# EAGLE board electronicDie_panel2x1 (EAGLE 9.6.2)
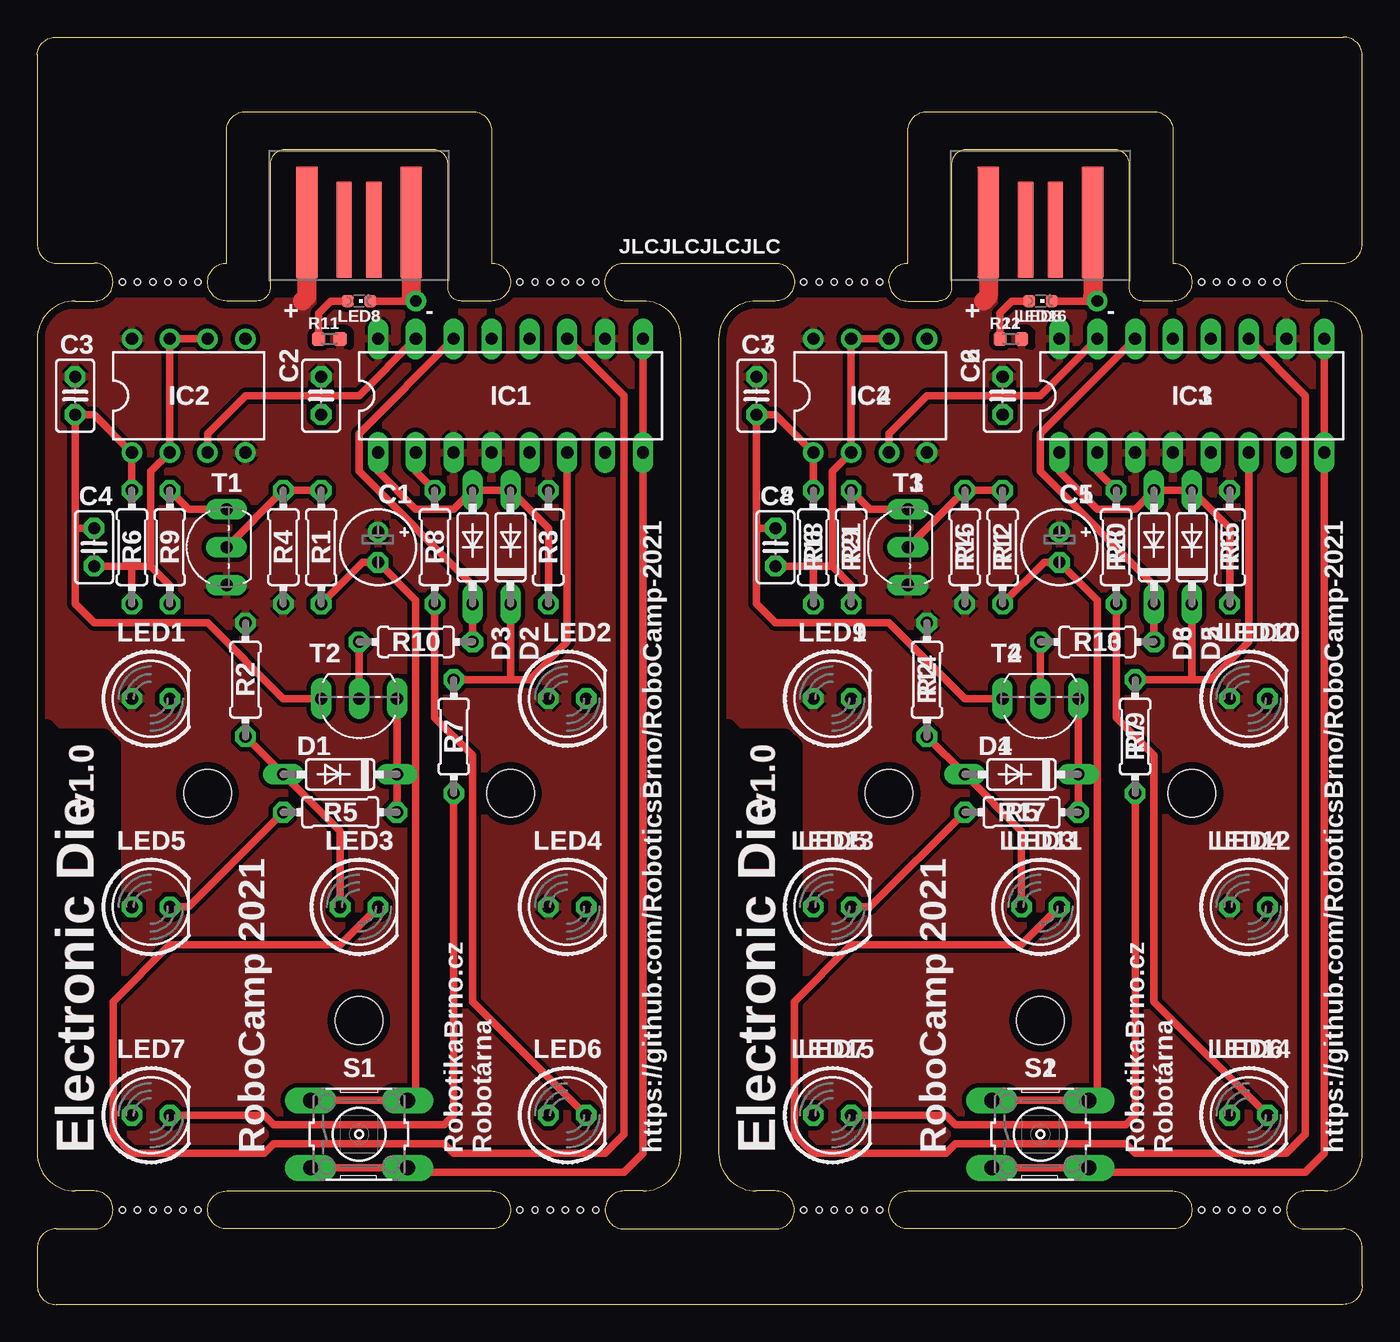
[diagram p0: board, top side]
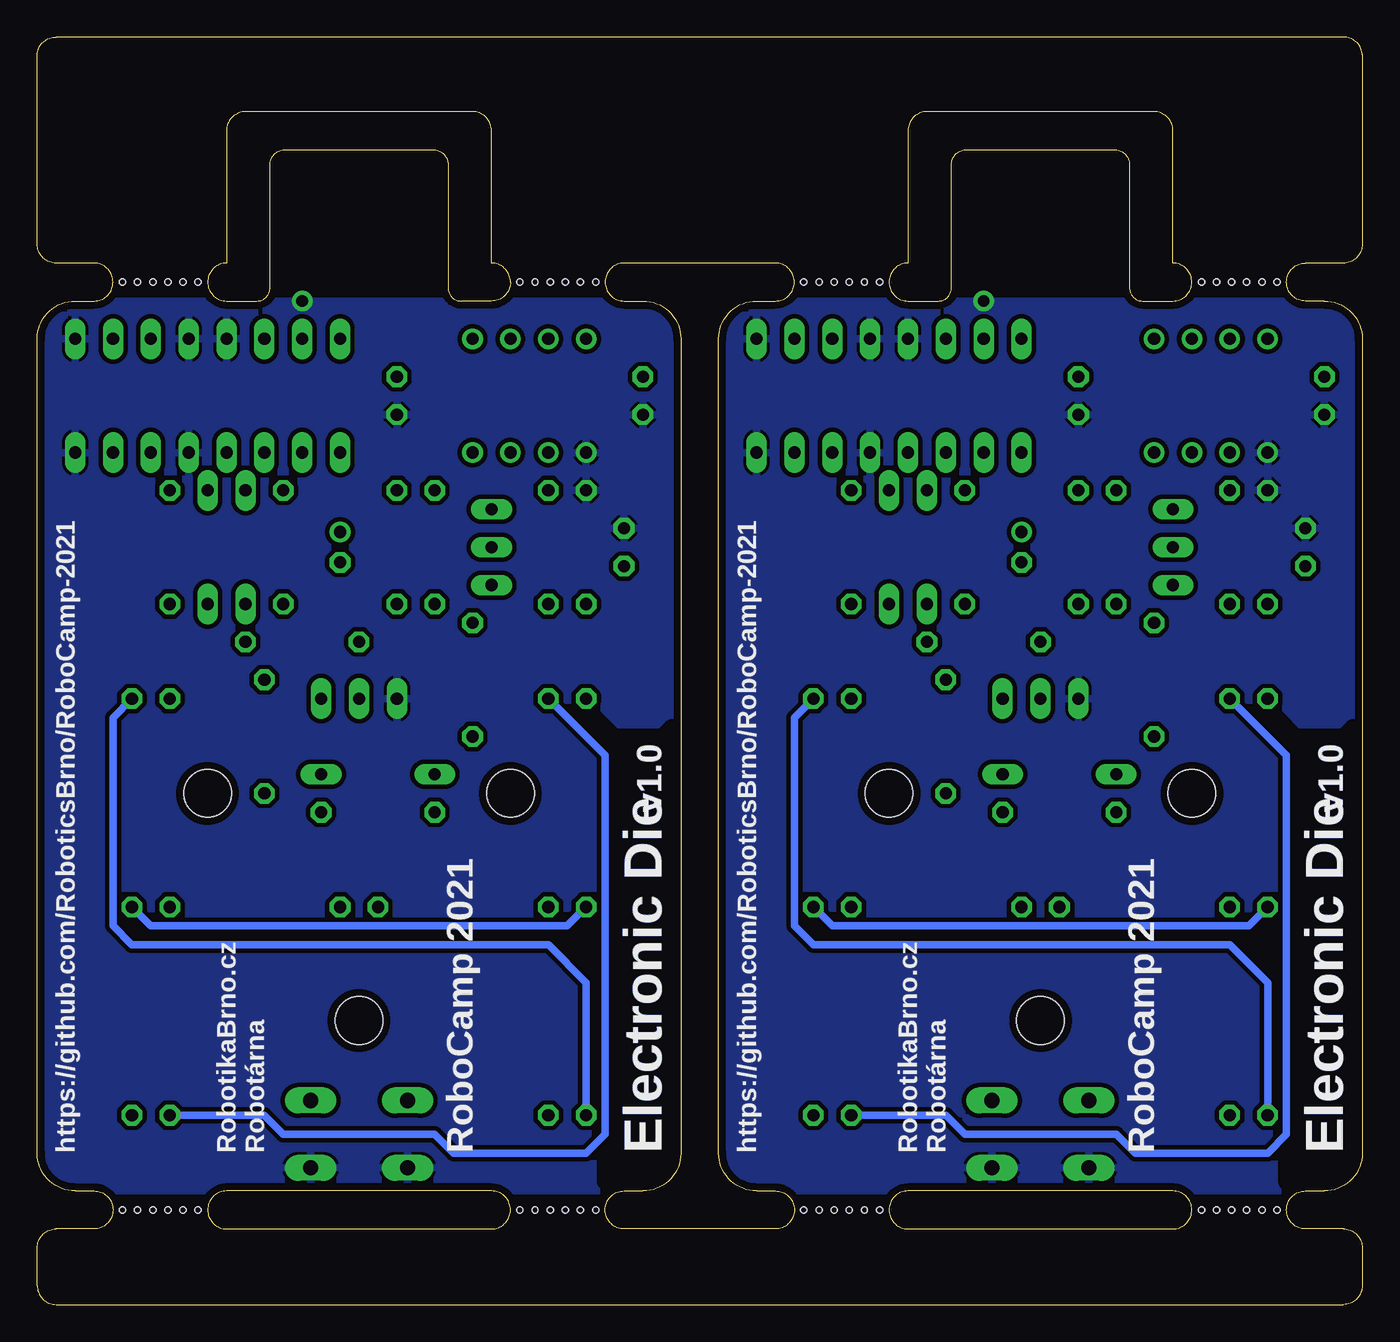
[diagram p1: board, bottom side, seen from below]

Size 88.9 x 85 mm. Coordinates in mm from the lower left corner, seen from the top.
Outline: 0,10.16 arc90 2.54,7.62 3.81,7.62 arc-90 5.08,6.35 arc-90 3.81,5.08 1.27,5.08 arc90 0,3.81 0,1.27 arc90 1.27,0 87.63,0 arc90 88.9,1.27 88.9,3.81 arc90 87.63,5.08 85.09,5.08 arc-90 83.82,6.35 arc-90 85.09,7.62 86.36,7.62 arc90 88.9,10.16 88.9,64.77 arc90 86.36,67.31 85.09,67.31 arc-90 83.82,68.58 arc-90 85.09,69.85 87.63,69.85 arc90 88.9,71.12 88.9,83.82 arc90 87.63,85 1.27,85 arc90 0,83.82 0,71.12 arc90 1.27,69.85 3.81,69.85 arc-90 5.08,68.58 arc-90 3.81,67.31 2.54,67.31 arc90 0,64.77 0,10.16
Outline: 40.64,7.62 arc90 43.18,10.16 43.18,64.77 arc90 40.64,67.31 39.37,67.31 arc-90 38.1,68.58 arc-90 39.37,69.85 49.53,69.85 arc-90 50.8,68.58 arc-90 49.53,67.31 48.26,67.31 arc90 45.72,64.77 45.72,10.16 arc90 48.26,7.62 49.53,7.62 arc-90 50.8,6.35 arc-90 49.53,5.08 39.37,5.08 arc-90 38.1,6.35 arc-90 39.37,7.62 40.64,7.62
Outline: 28.45,67.31 arc-90 27.56,68.2 27.56,76.45 arc90 26.54,77.47 16.64,77.47 arc90 15.62,76.45 15.62,68.2 arc-90 14.73,67.31 12.7,67.31 arc-90 11.43,68.58 arc-90 12.7,69.85 12.7,78.74 arc-90 13.97,80.01 29.21,80.01 arc-90 30.48,78.74 30.48,69.85 arc-90 31.75,68.58 arc-90 30.48,67.31 28.45,67.31
Outline: 74.17,67.31 arc-90 73.28,68.2 73.28,76.45 arc90 72.26,77.47 62.36,77.47 arc90 61.34,76.45 61.34,68.2 arc-90 60.45,67.31 58.42,67.31 arc-90 57.15,68.58 arc-90 58.42,69.85 58.42,78.74 arc-90 59.69,80.01 74.93,80.01 arc-90 76.2,78.74 76.2,69.85 arc-90 77.47,68.58 arc-90 76.2,67.31 74.17,67.31
Outline: 11.43,6.35 arc-90 12.7,7.62 30.48,7.62 arc-90 31.75,6.35 arc-90 30.48,5.08 12.7,5.08 arc-90 11.43,6.35
Outline: 57.15,6.35 arc-90 58.42,7.62 76.2,7.62 arc-90 77.47,6.35 arc-90 76.2,5.08 58.42,5.08 arc-90 57.15,6.35
Copper layers (1*16): Top 0.035mm / dielectric 2mm / Bottom 0.035mm
Design rules "roboticsbrno": minimum track width 0.15mm, minimum drill 0.3mm, track to track 0.15mm, track to pad 0.15mm, pad to pad 0.15mm, via to via 0.15mm, smd to smd 0.15mm, copper to edge 0.5mm, drill to drill 0.5mm, minimum pad ring 0.16mm, minimum via ring 0.16mm, stop-mask expansion 0.1mm, vias tented up to drill 0.4mm, thermal gap 0.2mm
Holes 3.2 mm at 11.43,34.29 31.75,34.29 21.59,19.05 57.15,34.29 77.47,34.29 67.31,19.05
Holes 0.4 mm at 5.71,68.58 6.73,68.58 7.75,68.58 8.76,68.58 9.78,68.58 10.79,68.58 32.38,68.58 33.4,68.58 34.42,68.58 35.43,68.58 36.45,68.58 37.47,68.58 51.44,68.58 52.45,68.58 53.47,68.58 54.48,68.58 55.5,68.58 56.52,68.58 78.11,68.58 79.12,68.58 80.14,68.58 81.15,68.58 82.17,68.58 83.19,68.58 5.71,6.35 6.73,6.35 7.75,6.35 8.76,6.35 9.78,6.35 10.79,6.35 32.38,6.35 33.4,6.35 34.42,6.35 35.43,6.35 36.45,6.35 37.47,6.35 51.44,6.35 52.45,6.35 53.47,6.35 54.48,6.35 55.5,6.35 56.52,6.35 78.11,6.35 79.12,6.35 80.14,6.35 81.15,6.35 82.17,6.35 83.19,6.35
tRestrict: 14 lines
bRestrict: 8 lines

## Footprints (pad centres in the part's own frame; a part is rotated, then mirrored left to right if it is on the bottom)
E2-5 = drill 0.813 pad 1.27: + -1.016,0 | drill 0.813 pad 1.27 octagon: - 1.016,0
C025-025X050 = drill 0.813 octagon: 1 -1.27,0; 2 1.27,0
DO35-7 = drill 0.813 long: A 3.81,0; C -3.81,0
DIL16 = drill 0.813 long: 1 -8.89,-3.81; 2 -6.35,-3.81; 3 -3.81,-3.81; 4 -1.27,-3.81; 5 1.27,-3.81; 6 3.81,-3.81; 7 6.35,-3.81; 8 8.89,-3.81; 9 8.89,3.81; 10 6.35,3.81; 11 3.81,3.81; 12 1.27,3.81; 13 -1.27,3.81; 14 -3.81,3.81; 15 -6.35,3.81; 16 -8.89,3.81
DIL08 = drill 0.813 pad 1.27: 1 -3.81,-3.81; 2 -1.27,-3.81; 3 1.27,-3.81; 4 3.81,-3.81; 5 3.81,3.81; 6 1.27,3.81; 7 -1.27,3.81; 8 -3.81,3.81
LED5MM = drill 0.813 octagon: A -1.27,0; K 1.27,0
CHIPLED_0603 = smd 0.8 x 0.8: A 0.75,0; C -0.75,0
0204/7 = drill 0.813 octagon: 1 -3.81,0; 2 3.81,0
R0603 = smd 0.89 x 0.93: 1 -0.72,0; 2 0.72,0
B3F-10XX = drill 1.016 long: 1 -3.251,2.261; 2 3.251,2.261; 3 -3.251,-2.261; 4 3.251,-2.261
TO92-EBC = drill 0.813 long: B 0,-1.27; C 2.54,-1.27; E -2.54,-1.27
TO92-CBE = drill 0.813 long: B 0,0; C -2.54,0; E 2.54,0
USB-A-PCB = smd 7.5 x 1.5: 5V -0.2,-3.5; GND -0.2,3.5 | smd 6.5 x 1.067: USB_M 0.3,-1; USB_P 0.3,1

## Placement (x,y rotation side)
C1  1u  [E2-5]  22.86,50.8 270 top
C2  100n  [C025-025X050]  19.05,60.96 270 top
C3  100n  [C025-025X050]  2.54,60.96 270 top
C4  100n  [C025-025X050]  3.81,50.8 90 top
C5  1u  [E2-5]  68.58,50.8 270 top
C6  100n  [C025-025X050]  64.77,60.96 270 top
C7  100n  [C025-025X050]  48.26,60.96 270 top
C8  100n  [C025-025X050]  49.53,50.8 90 top
D1  1N4148  [DO35-7]  20.32,35.56 180 top
D2  1N4148  [DO35-7]  31.75,50.8 90 top
D3  1N4148  [DO35-7]  29.21,50.8 90 top
D4  1N4148  [DO35-7]  66.04,35.56 180 top
D5  1N4148  [DO35-7]  77.47,50.8 90 top
D6  1N4148  [DO35-7]  74.93,50.8 90 top
IC1  CD4029N  [DIL16]  31.75,60.96 0 top
IC2  NE555N  [DIL08]  10.16,60.96 0 top
IC3  CD4029N  [DIL16]  77.47,60.96 0 top
IC4  NE555N  [DIL08]  55.88,60.96 0 top
LED1  red  [LED5MM]  7.62,40.64 0 top
LED2  red  [LED5MM]  35.56,40.64 0 top
LED3  red  [LED5MM]  21.59,26.67 0 top
LED4  red  [LED5MM]  35.56,26.67 0 top
LED5  red  [LED5MM]  7.62,26.67 0 top
LED6  red  [LED5MM]  35.56,12.7 0 top
LED7  red  [LED5MM]  7.62,12.7 0 top
LED8  green  [CHIPLED_0603]  21.59,67.31 180 top
LED9  red  [LED5MM]  53.34,40.64 0 top
LED10  red  [LED5MM]  81.28,40.64 0 top
LED11  red  [LED5MM]  67.31,26.67 0 top
LED12  red  [LED5MM]  81.28,26.67 0 top
LED13  red  [LED5MM]  53.34,26.67 0 top
LED14  red  [LED5MM]  81.28,12.7 0 top
LED15  red  [LED5MM]  53.34,12.7 0 top
LED16  green  [CHIPLED_0603]  67.31,67.31 180 top
R1  3M3  [0204/7]  16.51,50.8 270 top
R2  2k2  [0204/7]  13.97,41.91 90 top
R3  100k  [0204/7]  34.29,50.8 90 top
R4  10M  [0204/7]  19.05,50.8 90 top
R5  1k  [0204/7]  20.32,33.02 180 top
R6  10k  [0204/7]  8.89,50.8 90 top
R7  1k  [0204/7]  27.94,38.1 270 top
R8  1k  [0204/7]  26.67,50.8 270 top
R9  4M7  [0204/7]  6.35,50.8 270 top
R10  100k  [0204/7]  25.4,44.45 180 top
R11  1k  [R0603]  19.6,64.77 0 top
R12  3M3  [0204/7]  62.23,50.8 270 top
R13  100k  [0204/7]  71.12,44.45 180 top
R14  2k2  [0204/7]  59.69,41.91 90 top
R15  100k  [0204/7]  80.01,50.8 90 top
R16  10M  [0204/7]  64.77,50.8 90 top
R17  1k  [0204/7]  66.04,33.02 180 top
R18  10k  [0204/7]  54.61,50.8 90 top
R19  1k  [0204/7]  73.66,38.1 270 top
R20  1k  [0204/7]  72.39,50.8 270 top
R21  4M7  [0204/7]  52.07,50.8 270 top
R22  1k  [R0603]  65.32,64.77 0 top
S1  [B3F-10XX]  21.59,11.43 0 top
S2  [B3F-10XX]  67.31,11.43 0 top
T1  BC327  [TO92-EBC]  11.43,50.8 90 top
T2  BC337  [TO92-CBE]  21.59,40.64 180 top
T3  BC327  [TO92-EBC]  57.15,50.8 90 top
T4  BC337  [TO92-CBE]  67.31,40.64 180 top
X1  USBPCB  [USB-A-PCB]  21.59,72.39 270 top
X2  USBPCB  [USB-A-PCB]  67.31,72.39 270 top

## Library data of the parts
C1-C8 R1-R22 = rcl_upravena
D1-D6 = diode
IC1 IC3 = 40xx
IC2 IC4 = 555
LED1-LED16 = led
S1 S2 = switch-omron; MPN: B3F-1000; OC_FARNELL: 176432; OC_NEWARK: 36M3542
T1-T4 = transistor
X1 X2 = USB

## Nets
+5V: C1.+ C2.1 C3.1 IC1.3 IC1.4 IC1.10 IC1.16 IC2.4 IC2.8 LED1.A LED2.A LED4.A R1.2 R2.2 R3.2 R11.2 T1.E X1.5V
+5V1: C5.+ C6.1 C7.1 IC3.3 IC3.4 IC3.10 IC3.16 IC4.4 IC4.8 LED9.A LED10.A LED12.A R12.2 R14.2 R15.2 R22.2 T3.E X2.5V
GND: C2.2 C3.2 C4.2 IC1.5 IC1.8 IC1.9 IC1.12 IC1.13 IC2.1 LED8.C R9.1 S1.3 S1.4 T2.E X1.GND
GND1: C6.2 C7.2 C8.2 IC3.5 IC3.8 IC3.9 IC3.12 IC3.13 IC4.1 LED16.C R21.1 S2.3 S2.4 T4.E X2.GND
N$1: C1.- R4.1 S1.1 S1.2
N$2: R1.1 R4.2 T1.B
N$3: LED8.A R11.1
N$4: R6.2 T1.C
N$5: C4.1 IC2.2 IC2.6 IC2.7 R6.1 R9.2
N$6: IC2.5
N$7: IC1.15 IC2.3
N$8: LED7.K R7.2
N$9: D2.A D3.A IC1.1 R3.1
N$10: D2.C IC1.6 R7.1
N$11: D3.C IC1.14 R10.1
N$12: IC1.2 R8.1
N$13: LED4.K LED5.A
N$14: LED2.K LED7.A
N$15: IC1.7
N$16: LED1.K LED6.A
N$17: R10.2 T2.B
N$18: LED5.K R5.2
N$19: D1.A LED3.A R2.1
N$20: IC1.11 LED3.K
N$21: D1.C R5.1 T2.C
N$22: LED6.K R8.2
N$23: X1.USB_M
N$24: X1.USB_P
N$25: C5.- R16.1 S2.1 S2.2
N$26: R12.1 R16.2 T3.B
N$27: R18.2 T3.C
N$28: C8.1 IC4.2 IC4.6 IC4.7 R18.1 R21.2
N$29: IC4.5
N$30: IC3.15 IC4.3
N$31: D5.A D6.A IC3.1 R15.1
N$32: D5.C IC3.6 R19.1
N$33: D6.C IC3.14 R13.1
N$34: IC3.2 R20.1
N$35: IC3.7
N$36: LED12.K LED13.A
N$37: LED10.K LED15.A
N$38: LED15.K R19.2
N$39: LED13.K R17.2
N$40: D4.A LED11.A R14.1
N$41: IC3.11 LED11.K
N$42: D4.C R17.1 T4.C
N$43: LED9.K LED14.A
N$44: R13.2 T4.B
N$45: LED14.K R20.2
N$46: LED16.A R22.1
N$47: X2.USB_M
N$48: X2.USB_P

## Tracks (layer width: path | path; a pad name or v marks a point on that pad's centre or on a via)
+5V
  Top 1.27: X1.5V 18.09,67.62 17.78,67.31
  pour Top (isolate 0.305): 0,7.62 0,67.31 43.18,67.31 43.18,7.62
+5V1
  Top 1.27: X2.5V 63.81,67.62 63.5,67.31
  pour Top (isolate 0.305): 45.72,7.62 45.72,67.31 88.9,67.31 88.9,7.62
GND  (via drill 0.8)
  Top 0.508: T2.E 16.51,40.64 11.43,45.72 3.81,45.72 2.54,46.99 2.54,52.07 | 2.54,52.07 C3.2 3.81,59.69 IC2.1 R9.1 | C4.2 2.54,52.07 | IC1.9 IC1.8 40.64,10.16 39.37,8.89 25.12,8.89 S1.4 S1.3 | v25.4,67.31 LED8.C
  Top 1.27: X1.GND 25.09,67.62 v25.4,67.31
  pour Bottom (isolate 0.305): 0,7.62 0,67.31 43.18,67.31 43.18,7.62
GND1  (via drill 0.8)
  Top 0.508: T4.E 62.23,40.64 57.15,45.72 49.53,45.72 48.26,46.99 48.26,52.07 | 48.26,52.07 C7.2 49.53,59.69 IC4.1 R21.1 | C8.2 48.26,52.07 | IC3.9 IC3.8 86.36,10.16 85.09,8.89 70.84,8.89 S2.4 S2.3 | v71.12,67.31 LED16.C
  Top 1.27: X2.GND 70.81,67.62 v71.12,67.31
  pour Bottom (isolate 0.305): 45.72,7.62 45.72,67.31 88.9,67.31 88.9,7.62
N$1
  Top 0.508: R4.1 21.84,49.78 C1.- 25.4,47.24 25.4,14.25 S1.2 S1.1
N$2
  Top 0.508: R4.2 R1.1 T1.B
N$3
  Top 0.508: LED8.A 19.68,67.31 18.88,66.5 R11.1
N$4
  Top 0.508: T1.C 10.16,53.34 R6.2
N$5
  Top 0.508: IC2.6 IC2.7 IC2.2 7.62,55.88 7.62,49.53 | 7.62,49.53 6.35,49.53 | 6.35,49.53 C4.1 | R9.2 6.35,49.53 | R6.1 8.89,48.26 7.62,49.53
N$7
  Top 0.508: IC2.3 11.43,58.42 13.97,60.96 21.59,60.96 IC1.15
N$8
  Top 0.508: LED7.K 15.24,12.7 15.88,12.06 27.3,12.06 27.94,12.7 R7.2
N$9
  Top 0.508: IC1.1 22.86,55.88 25.4,53.34 27.94,53.34 D3.A D2.A 34.29,52.07 R3.1
N$10
  Top 0.508: 31.75,41.91 33.02,41.91 35.56,44.45 IC1.6 | 31.75,41.91 R7.1 | D2.C 31.75,41.91
N$11
  Top 0.508: R10.1 D3.C 29.21,48.26 21.59,55.88 21.59,58.42 IC1.14
N$12
  Top 0.508: R8.1 25.4,55.88 IC1.2
N$13
  Bottom 0.508: LED5.A 7.62,25.4 35.56,25.4 LED4.K
N$14
  Bottom 0.508: LED2.K 38.1,39.37 38.1,25.4 36.83,24.13 8.89,24.13 6.35,21.59 LED7.A
N$16
  Bottom 0.508: LED1.K 5.08,36.83 5.08,11.43 6.35,10.16 15.24,10.16 16.51,11.43 26.67,11.43 27.94,12.7 LED6.A
N$17
  Top 0.508: R10.2 T2.B
N$18
  Top 0.508: LED5.K 10.16,26.67 R5.2
N$19
  Top 0.508: R2.1 D1.A 20.32,31.75 LED3.A
N$20
  Top 0.508: IC1.11 39.37,60.96 39.37,11.43 38.1,10.16 27.94,10.16 27.3,10.79 15.88,10.79 15.24,10.16 6.35,10.16 5.08,11.43 5.08,20.32 8.89,24.13 20.32,24.13 LED3.K
N$21
  Top 0.508: R5.1 D1.C T2.C
N$22
  Top 0.508: R8.2 26.67,39.37 29.21,36.83 29.21,20.32 LED6.K
N$25
  Top 0.508: R16.1 67.56,49.78 C5.- 71.12,47.24 71.12,14.25 S2.2 S2.1
N$26
  Top 0.508: R16.2 R12.1 T3.B
N$27
  Top 0.508: T3.C 55.88,53.34 R18.2
N$28
  Top 0.508: IC4.6 IC4.7 IC4.2 53.34,55.88 53.34,49.53 | 53.34,49.53 52.07,49.53 | 52.07,49.53 C8.1 | R21.2 52.07,49.53 | R18.1 54.61,48.26 53.34,49.53
N$30
  Top 0.508: IC4.3 57.15,58.42 59.69,60.96 67.31,60.96 IC3.15
N$31
  Top 0.508: IC3.1 68.58,55.88 71.12,53.34 73.66,53.34 D6.A D5.A 80.01,52.07 R15.1
N$32
  Top 0.508: 77.47,41.91 78.74,41.91 81.28,44.45 IC3.6 | 77.47,41.91 R19.1 | D5.C 77.47,41.91
N$33
  Top 0.508: R13.1 D6.C 74.93,48.26 67.31,55.88 67.31,58.42 IC3.14
N$34
  Top 0.508: R20.1 71.12,55.88 IC3.2
N$36
  Bottom 0.508: LED13.A 53.34,25.4 81.28,25.4 LED12.K
N$37
  Bottom 0.508: LED10.K 83.82,39.37 83.82,25.4 82.55,24.13 54.61,24.13 52.07,21.59 LED15.A
N$38
  Top 0.508: LED15.K 60.96,12.7 61.59,12.06 73.03,12.06 73.66,12.7 R19.2
N$39
  Top 0.508: LED13.K 55.88,26.67 R17.2
N$40
  Top 0.508: R14.1 D4.A 66.04,31.75 LED11.A
N$41
  Top 0.508: IC3.11 85.09,60.96 85.09,11.43 83.82,10.16 73.66,10.16 73.03,10.79 61.59,10.79 60.96,10.16 52.07,10.16 50.8,11.43 50.8,20.32 54.61,24.13 66.04,24.13 LED11.K
N$42
  Top 0.508: R17.1 D4.C T4.C
N$43
  Bottom 0.508: LED9.K 50.8,36.83 50.8,11.43 52.07,10.16 60.96,10.16 62.23,11.43 72.39,11.43 73.66,12.7 LED14.A
N$44
  Top 0.508: R13.2 T4.B
N$45
  Top 0.508: R20.2 72.39,39.37 74.93,36.83 74.93,20.32 LED14.K
N$46
  Top 0.508: LED16.A 65.41,67.31 64.6,66.5 R22.1

## Text on the board
Top: v1.0 | v1.0 | Electronic Die | Electronic Die
Bottom: v1.0 | v1.0 | Electronic Die | Electronic Die
tSilk: JLCJLCJLCJLC | + | - | + | - | v1.0 | v1.0 | Electronic Die | RoboCamp 2021 | RobotikaBrno.cz / Robotárna | https://github.com/RoboticsBrno/RoboCamp-2021 | Electronic Die | RoboCamp 2021 | RobotikaBrno.cz / Robotárna | https://github.com/RoboticsBrno/RoboCamp-2021
bSilk: v1.0 | v1.0 | Electronic Die | RoboCamp 2021 | RobotikaBrno.cz / Robotárna | https://github.com/RoboticsBrno/RoboCamp-2021 | Electronic Die | RoboCamp 2021 | RobotikaBrno.cz / Robotárna | https://github.com/RoboticsBrno/RoboCamp-2021
_tNames: LED8 | LED8 | R11 | R11 | C3 | C3 | C2 | C2 | IC2 | IC1 | IC2 | IC1 | C4 | T1 | C1 | C4 | T1 | C1 | R6 | R9 | R4 | R1 | R8 | R3 | R6 | R9 | R4 | R1 | R8 | R3 | D3 | D2 | D3 | D2 | LED1 | R10 | LED2 | LED1 | R10 | LED2 | T2 | T2 | R2 | R2 | R7 | R7 | D1 | D1 | R5 | R5 | LED5 | LED3 | LED4 | LED5 | LED3 | LED4 | LED7 | LED6 | LED7 | LED6 | S1 | S1